# Altium PCB saw_filter_pcb.PcbDoc
Units mm, origin at the board's own origin, x right, y up, seen from the top; angles counter-clockwise.
Board outline 45 x 18 mm, 2 copper layers (Top Layer, Bottom Layer), stack 1.671 mm thick; 16 components, 9 nets, 49 pads, 46 vias.
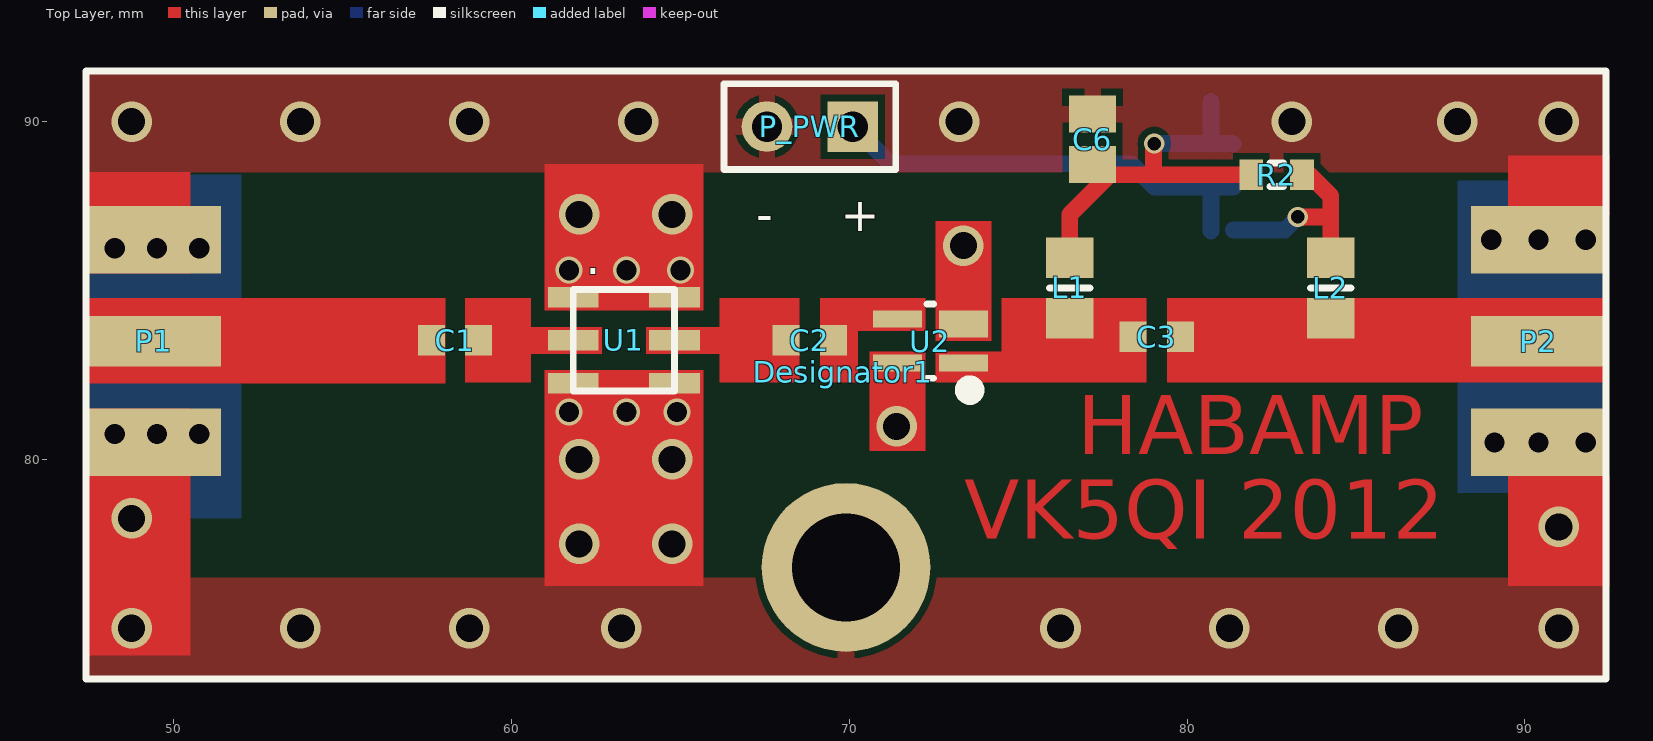
[diagram p0: Top Layer view]
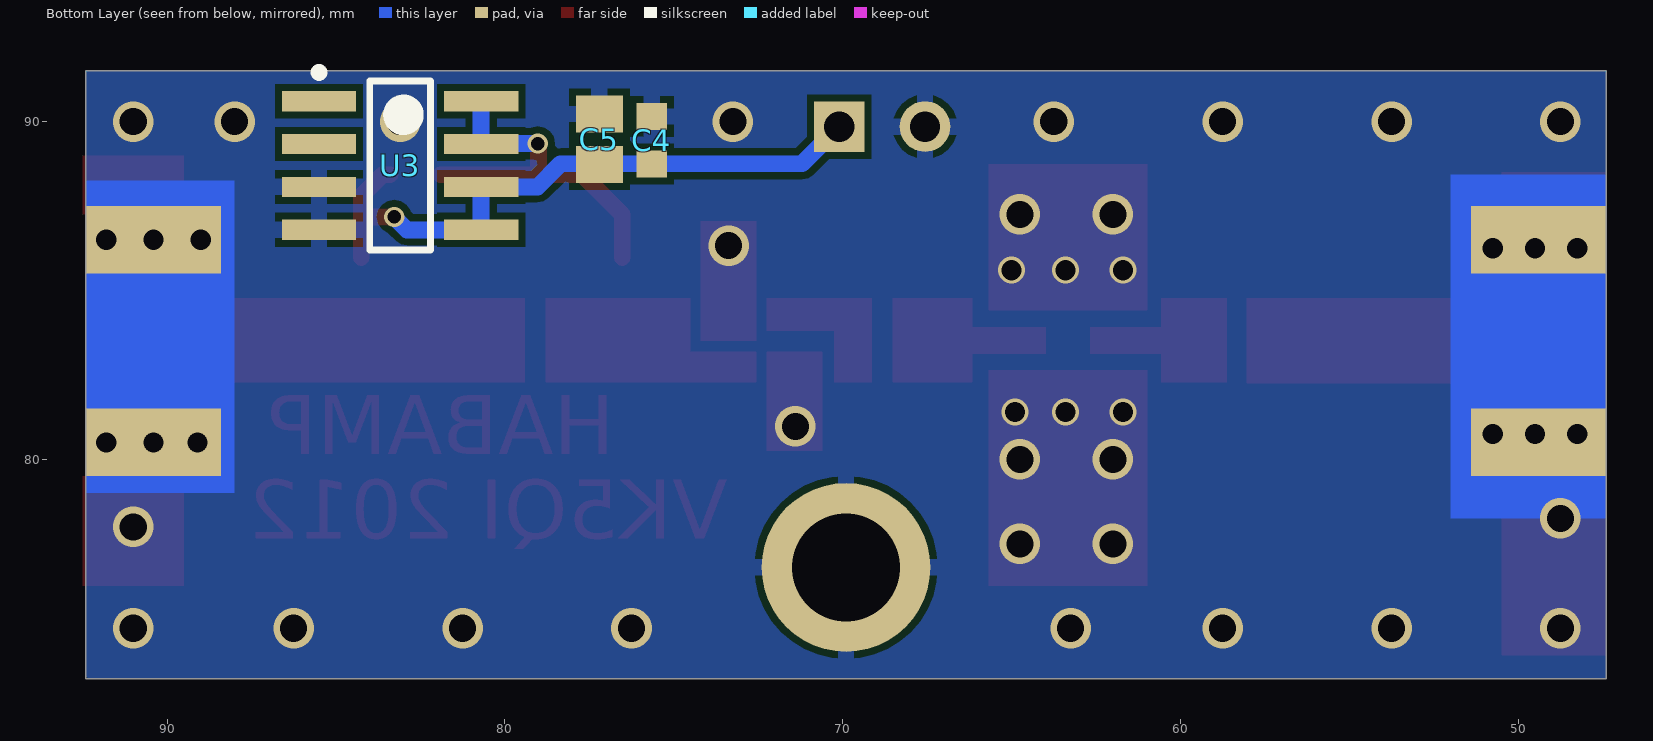
[diagram p1: Bottom Layer view, seen from below]

## Layer stack, top to bottom
Top Layer: signal copper 0.0356
Dielectric: core 1.6, FR-4, Dk 4.8
Bottom Layer: signal copper 0.0356

## Board outline
47.4,73.5 92.4,73.5 92.4,91.5 47.4,91.5

## Design rules (kind name [scope] priority, off if disabled: settings)
Clearance [All] p1: gap=0.2
ComponentClearance [All] p1 off: gap=0.254 collisioncheckmode=3 verticalgap=0.254 showdistances=FALSE
PolygonConnect PolygonConnect_1 [IsVia] p1: connectstyle=Direct reliefconductorwidth=0.254 reliefentries=4 polygonreliefangle="90 Angle"
PolygonConnect [All] p2: connectstyle=Relief reliefconductorwidth=0.5 reliefentries=4 polygonreliefangle="90 Angle"
RoutingVias [All] p1: holewidth=0.3 width=0.4 viastyle="Through Hole" minholewidth=0.711 minwidth=1.27 maxholewidth=0.711 maxwidth=1.27
SilkscreenOverComponentPads [All] p1: minsilkscreentomaskgap=0.254
SolderMaskExpansion [All] p1: expansion=0.102
Width [All] p1: maxlimit=5 minlimit=0.2 preferedwidth=0.2
26 further rules are at their usual default settings.

## Classes and differential pairs
component class saw_filter_pcb: C1 C2 C3 C4 C5 C6 L1 L2 P1 P2 P_PWR R2 U1 U2 U3

## Components (designator, comment, footprint, x,y, rotation, side; value= is the part's Value field where it differs from the comment)
C1 "Cap Semi" 1608[0603] 58.325,83.525 r0 top
C2 "Cap Semi" 1608[0603] 68.825,83.525 r0 top
C3 "Cap Semi" 1608[0603] 79.1,83.625 r0 top
C4 "Cap Semi" 1608[0603] 75.65,89.45 r270 bottom
C5 "Cap Pol3" C0805 77.2,89.475 r90 bottom
C6 "Cap Pol3" C0805 77.2,89.475 r90 top
Designator1 "Comment" "Hammond 1590H" 69.825,82.6 r90 top
L1 "BMB2A1000BN3" 6-0805_N 76.525,85.075 r90 top
L2 "BMB2A1000BN3" 6-0805_N 84.25,85.075 r90 top
P1 "SMA Con" SMA_EDGE 49.4,83.5 r90 top
P2 "SMA Con" SMA_EDGE 90.4,83.5 r270 top
P_PWR "Header 2" HDR1X2 70.1,89.85 r180 top
R2 "Res3" J1-0603 82.65,88.425 r180 top
U1 "DCC6C SAW Filter" DCC6C 63.325,83.525 r90 top
U2 "PSA4-5043+" SOT-343_M 72.4,83.5 r180 top
U3 "TPS76650" TPS76633 83.1,88.7 r180 bottom

## Footprints (in the part's own frame and the unit in brackets; to place one, negate y for a bottom-side part, rotate by r counter-clockwise, add the part's x,y. Pads: shape width x height; smd on the part's side, far side on the other; paste and mask are expansions set on the pad)
6-0805_N [mm] "Chip Resistor, Body 2.0x1.2mm, IPC Medium Density"
  rect 1.2x1.4 smd: 1(-0.9,0) 2(0.9,0)
  silkscreen extent 0,-0.6 0,0.6, body extent -1.07,-0.7 1.07,0.7, height 0.7
1608[0603] [mm] "Chip Capacitor, Body 1.6x0.8mm, IPC High Density"
  rect 0.8x0.9 smd: 1(-0.7,0) 2(0.7,0)
  body extent -0.87,-0.48 0.87,0.48, height 1.3
C0805 [mm] "Chip Capacitor, Body 2.0x1.3mm, IPC High Density"
  rect 1.1x1.4 smd: 1(-0.75,0) 2(0.75,0)
  body extent -1.1,-0.72 1.1,0.72, height 1.4
DCC6C [mm]
  rect 0.6x1.5 smd: 1(-1.275,1.5) 2(0,1.5) 3(1.275,1.5) 4(1.275,-1.5) 5(0,-1.5) 6(-1.275,-1.5)
  silkscreen extent -1.5,-1.5 1.5,1.5, body extent -1.5,-1.5 1.5,1.5, height 1.14
"Hammond 1590H" [mm]
  body extent -19,-26.25 19,26.25, height 15
HDR1X2 [mm] "Connector; Header; 2 Position"
  rect 1.5x1.5 hole 0.9: 1(0,0)
  round 1.5 hole 0.9: 2(2.54,0)
  silkscreen extent -1.27,-1.27 3.81,1.27
J1-0603 [mm] "Chip Resistor, Body 1.6x0.8mm, IPC High Density"
  rect 0.7x0.9 smd: 1(-0.75,0) 2(0.75,0)
  silkscreen extent -0.2,-0.35 0.2,0.35, body extent -0.85,-0.48 0.85,0.48, height 0.9
SMA_EDGE [mm]
  rect 1.5x4 smd: 1(0,0)
  rect 2x4 smd: 2(-3,0) 2(3,0)
  rect 2x4 smd far side: 2(-3,0) 2(3,0)
  body extent -3.17,-1.73 3.18,11.6, height 3.56
SOT-343_M [mm] "SOT343, 4-Leads, Body 2x1.3 mm, Pitch 1.3mm, Lead Span 2.1mm, IPC Low Density"
  rect 1.45x0.5 smd: 1(-0.975,0.65) 3(0.975,-0.65) 4(0.975,0.65)
  rect 1.45x0.8 smd: 2(-0.975,-0.5)
  silkscreen extent -1.02,-1.1 0.1,1.35, body extent -0.7,-1.1 0.7,1.1, height 1
TPS76633 [mm] "SOIC, 8-Leads, Body 5.0x4.0mm (max), Pitch 1.27mm, IPC Medium Density"
  rect 2.2x0.6 smd: 1(-2.4,1.905) 2(-2.4,0.635) 3(-2.4,-0.635) 4(-2.4,-1.905) 5(2.4,-1.905) 6(2.4,-0.635) 7(2.4,0.635) 8(2.4,1.905)
  silkscreen extent -2.53,-2.5 0.9,2.88, body extent -2,-2.5 2,2.5, height 1.75

## Part data
C1 C2 C3 C4: "Capacitor (Semiconductor SIM Model)"
C5 C6: "Polarized Capacitor (Surface Mount)"
L1 L2: library part Inductor, "Inductor"
P1 P2: "Power Connector"
P_PWR: "Header, 2-Pin"
R2: "Resistor"

## Free pads (board coordinates)
  round 5 hole 3.2: 7(69.9,76.8)

## Via types
v1: diameter 1.2, hole 0.8, Top Layer to Bottom Layer, 24 vias
v2: diameter 0.8, hole 0.6, Top Layer to Bottom Layer, tented both sides, 9 vias
v3: diameter 0.8, hole 0.6, Top Layer to Bottom Layer, 9 vias
v4: diameter 1.2, hole 0.8, Top Layer to Bottom Layer, tented both sides, 2 vias
v5: diameter 0.6, hole 0.4, Top Layer to Bottom Layer, tented both sides, 2 vias

## Nets (pads, with @x,y where several pads share a name; then routed paths per layer and width w, separated by ;. In a path a pad name is that pad's centre, name@x,y a point inside that pad or via, vN(x,y) a via of type N, cw(c..) or ccw(c..) an arc to the next point about the centre after c; other vN are vias at no path point)
GND: C4.1 C5.2 C6.2 P1.2 P2.2 P_PWR.2 pad.7 U1.1 U1.3 U1.4 U1.6 U2.2 U2.4 U3.3 U3.4
  other v1: 48.75,75 53.75,75 58.75,75 63.25,75 76.25,75 81.25,75 86.25,75 91,75 62,77.5 64.75,77.5 91,78 48.75,78.25 62,80 64.75,80 71.4,80.975 73.375,86.325 62,87.25 64.75,87.25 48.75,90 53.75,90 58.75,90 63.75,90 88,90 91,90
  other v2: 89.1,80.5 90.4,80.5 91.8,80.5 61.7,81.4 63.4,81.4 64.9,81.4 61.7,85.6 63.4,85.6 65,85.6
  other v3: 48.25,80.75 49.5,80.75 50.75,80.75 48.25,86.25 49.5,86.25 50.75,86.25 89,86.5 90.4,86.5 91.8,86.5
  other v4: 73.25,90 83.1,90
NetC1_1: C1.1 P1.1
NetC1_2: C1.2 U1.2
NetC2_1: C2.1 U1.5
NetC2_2: C2.2 U2.3
NetC3_1: C3.1 L1.1 U2.1
NetC3_2: C3.2 L2.1 P2.1
NetC4_2: C4.2 C5.1 L2.2 P_PWR.1 R2.1 U3.5 U3.6 | length 19.3
  Top Layer w0.5: v5(83.275,87.175) 84.25,87.175 ; R2.1 83.625,88.425 84.25,87.8 84.25,87.175 ; L2.2 84.25,87.175
  Bottom Layer w0.5: P_PWR.1 71.2,88.75 C4.2 78.35,88.75 79.035,88.065 U3.6@81.375,88.065 ; U3.5@80.7,86.755 U3.6@80.7,88.025 ; U3.5@81.375,86.795 82.895,86.795 v5(83.275,87.175)
NetC6_1: C6.1 L1.2 R2.2 U3.7 U3.8 | length 11.7
  Top Layer w0.5: L1.2 76.525,87.25 77.7,88.425 79,88.425 ; v5(79.025,89.35) 79,89.325 79,88.425 ; R2.2 79,88.425
  Bottom Layer w0.5: v5(79.025,89.35) 81.36,89.35 U3.7@81.375,89.335 ; U3.7@80.7,89.33 U3.8@80.7,90.6
pads on no net: U3.1 U3.2

## Polygon pours and split planes (outlines as drawn)
GND on Bottom Layer "Top Layer-No Net" (solid, pour order 2): 47.4,73.529 47.4,91.5 92.4,91.5 92.4,73.5
GND on Top Layer "Top Layer-No Net" (solid, pour order 4): 47.4,73.5 47.4,76.5 92.4,76.5 92.4,73.514
GND on Top Layer "Top Layer-No Net" (solid, pour order 6): 47.4,91.475 47.4,88.5 53.389,88.5 92.4,88.5 92.372,88.513 92.372,91.475

## Other copper
Top Layer:
  rectangle net GND: 89.5,87.25 92.5,89
  rectangle net GND: 89.5,76.25 92.5,79.5
  rectangle net GND: 47.4,85.5 50.5,88.5
  rectangle net GND: 47.4,74.2 50.5,81.5
  rectangle net GND: 72.55,83.5 74.2,87.05
  rectangle net GND: 70.6,80.25 72.25,83.2
  rectangle net NetC3_1: 72.55,82.275 75,83.2
  rectangle net NetC2_2: 69.9,83.8 72.25,84.775
  rectangle net NetC2_2: 69.125,82.275 70.25,84.775
  rectangle net NetC2_1: 66.15,82.275 68.525,84.775
  rectangle net NetC2_1: 63.975,83.125 66.3,83.925
  rectangle net NetC1_2: 58.625,82.275 60.575,84.775
  rectangle net NetC3_1: 74.5,82.275 78.8,84.775
  rectangle net NetC1_1: 47.4,82.25 58.05,84.775
  rectangle net NetC3_2: 79.4,82.275 92.4,84.775
  rectangle net GND: 60.975,76.25 65.675,82.65
  rectangle net GND: 60.975,84.4 65.675,88.75
  rectangle net NetC1_2: 60.375,83.125 62.675,83.925
  text "HABAMP" at 76.75,79.575 h3
  text "VK5QI 2012" at 73.4,77.075 h3
Bottom Layer:
  rectangle net GND: 47.4,78.25 52,88.426
  rectangle net GND: 88,79 92.4,88.25

## Silkscreen, mask and mechanical layers (free items; w line width, h text height)
Top Overlay:
  circle w0.45: c73.561,82.05 r0.214
  lines w0.2: 47.4,73.5 47.4,91.5 92.4,91.5 92.4,73.5 47.4,73.5
  text "-" at 67.25,86.75 h1
  text "+" at 69.75,86.75 h1
  text "." at 62.2,85.475 h1
Top Solder:
  rectangle: 87.15,88.5 89.5,91.5
  rectangle: 47.5,87.5 50.5,89
  region: 47.4,91.5 47.4,88.5 65.675,88.5 65.675,91.5
  region: 92.4,91.5 89.5,91.5 89.5,85.5 92.4,85.5
  region: 92.4,81.6 89.5,81.6 89.5,74.3 92.4,74.3
  region: 92.4,73.5 92.4,76.5 49.2,76.5 49.2,73.5
  rectangle: 47.4,73.5 50.5,81.5
  rectangle: 60.975,75.75 65.675,82.65
  rectangle: 60.975,84.4 65.675,88.75
  rectangle: 72.55,83.5 74.2,87.05
  rectangle: 70.6,80.25 72.25,82.85
  rectangle: 70.075,83.825 72.25,84.775
  rectangle: 72.55,82.275 74.85,83.2
  rectangle: 47.5,82.25 58.05,84.775
  rectangle: 58.625,82.275 60.575,84.775
  rectangle: 60.5,83.125 62.675,83.925
  rectangle: 63.975,83.125 66.3,83.925
  rectangle: 66.15,82.275 68.625,84.775
  rectangle: 69.025,82.275 70.25,84.775
  rectangle: 74.5,82.275 78.8,84.775
  rectangle: 79.4,82.275 92.4,84.775
Bottom Solder:
  rectangle: 87.15,85.5 92.375,91.45
  rectangle: 65.5,85.45 74.475,88.3
  rectangle: 47.4,85.4 65.675,91.5
  rectangle: 47.4,73.5 92.4,85.5
Drill Drawing:
  text ".LEGEND" at 105.88,81.28 h1.52
  text "Drill Drawing." at 105.88,78.74 h1.52

## Dimensions
47.4,76.2 to 92.4,76.2 on Mechanical 1
47.4,73.5 to 47.4,91.5 on Mechanical 1